# EAGLE board 01-transmitter (EAGLE 7.6.0)
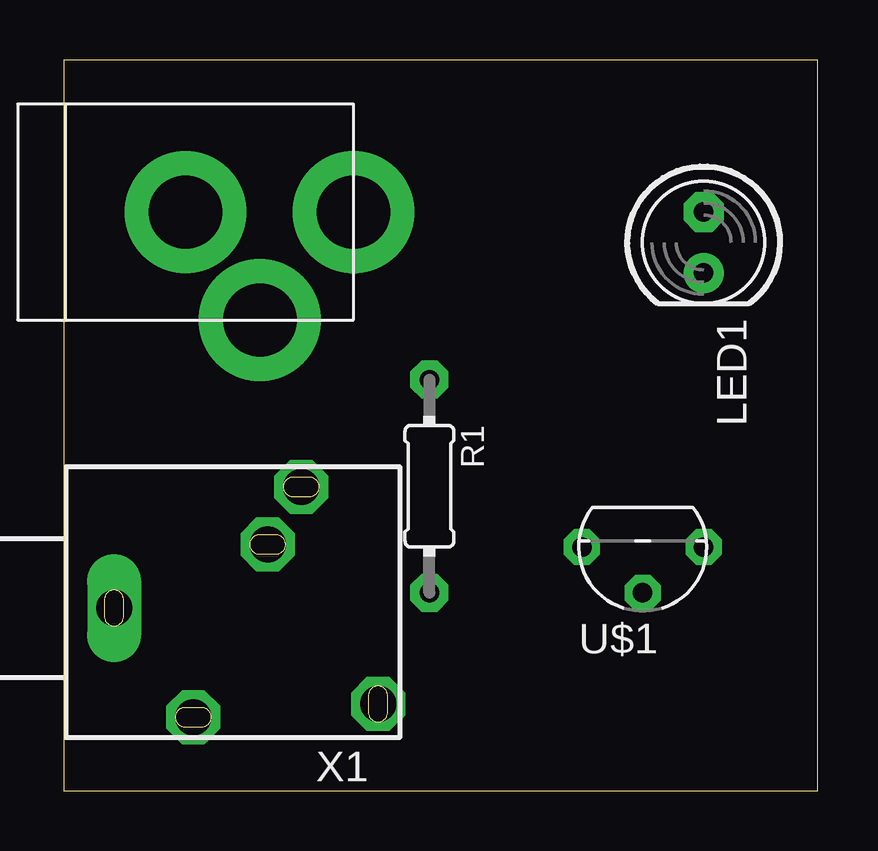
[diagram p0: board, top side]
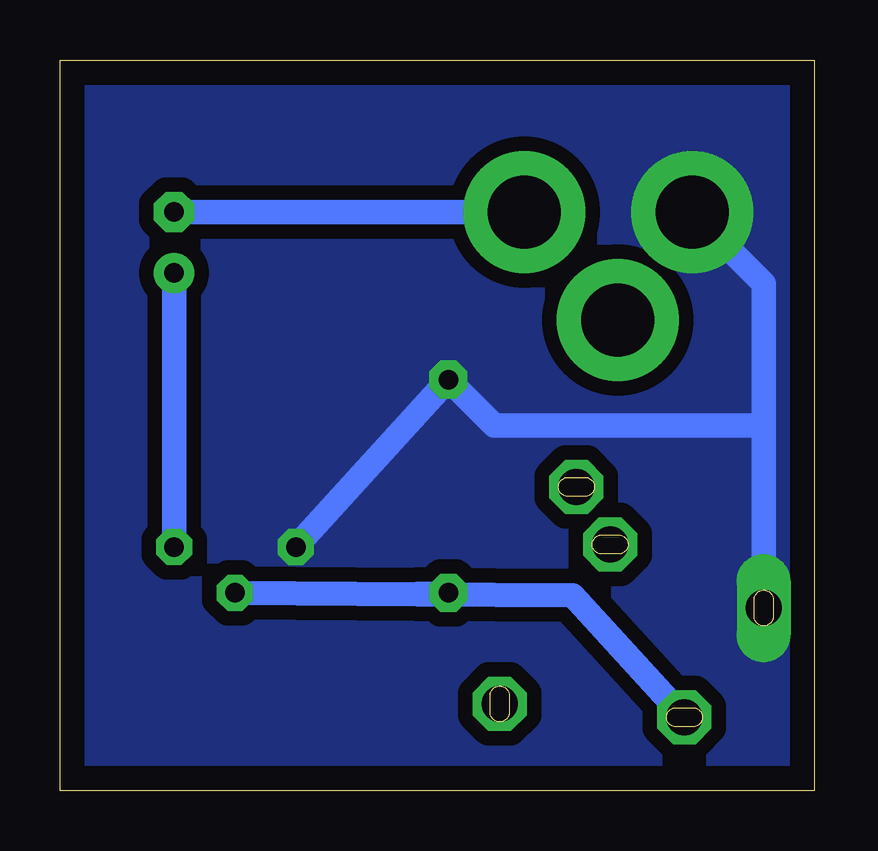
[diagram p1: board, bottom side, seen from below]

Size 31.42 x 30.47 mm. Coordinates in mm from the lower left corner, seen from the top.
Outline: 0,0 31.42,0 31.42,30.47 0,30.47 0,0
Copper layers (1*16): Top 0.035mm / dielectric 1.5mm / Bottom 0.035mm
Design rules "default *": minimum track width 10mil, minimum drill 24mil, track to track 20mil, track to pad 20mil, pad to pad 20mil, via to via 20mil, smd to smd 8mil, copper to edge 40mil, drill to drill 8mil, minimum pad ring 10mil, minimum via ring 8mil, stop-mask expansion 4mil, vias tented up to drill 0mil, thermal gap 10mil

## Footprints (pad centres in the part's own frame; a part is rotated, then mirrored left to right if it is on the bottom)
LED5MM = drill 0.813 pad 1.676 octagon: A -1.27,0 | drill 0.813 pad 1.676: K 1.27,0
0204/9 = drill 0.813 pad 1.575 octagon: 1 -4.445,0; 2 4.445,0
TO92C-L = drill 0.813 pad 1.5 octagon: 1 -2.54,0; 2 0,1.905; 3 2.54,0
1503_09_PIN15 = drill 1.5 pad 1.676 long: 1 0,-2.1 | drill 1.5 pad 2.184 octagon: 2 -4.55,-5.4; 3 5.05,-9.9; 4 -4,-13.1; 5 2.65,-8.5
SKT21L = drill 3.05 pad 5.08: 1 0,-7; 2 -4.5,-3.1; 3 0,0

## Placement (x,y rotation side)
LED1  [LED5MM]  26.67,22.86 270 top
R1  [0204/9]  15.24,12.7 270 top
U$1  2SK170TO92C-L  [TO92C-L]  24.13,10.16 180 top
X1  1503_09  [1503_09_PIN15]  0,7.62 90 top
X2  ACADAPTERL  [SKT21L]  5.08,24.13 90 top

## Library data of the parts
LED1 R1 U$1 X1 X2 = mita-akiba

## Nets
GND: R1.1 U$1.3 X1.1 X2.3
N$1: LED1.K U$1.1
N$3: R1.2 U$1.2 X1.2
VCC: LED1.A X2.1

## Tracks (layer width: path | path; a pad name or v marks a point on that pad's centre or on a via)
GND
  Bottom 1.016: 2.1,15.24 2.1,21.15 X2.3 | 2.1,15.24 X1.1 | U$1.3 R1.1 13.34,15.24 2.1,15.24
  pour Bottom (isolate 0.61, no thermals): 0,30.48 31.75,30.48 31.75,0 0,0
N$1
  Bottom 1.016: LED1.K U$1.1
N$3
  Bottom 1.016: X1.2 10.05,8.15 16.52,8.2 | 16.52,8.2 U$1.2 | R1.2 16.51,8.2 16.52,8.2
VCC
  Bottom 1.016: X2.1 LED1.A